# Altium PCB CPU_Board.PcbDoc
Units mil, origin at the board's own origin, x right, y up, seen from the top; angles counter-clockwise.
Board outline 6000 x 4000 mil, 2 copper layers (Top Layer, Bottom Layer); 90 components, 80 nets, 562 pads, 68 vias.
Unrouted connection lines stored in the file: 148.
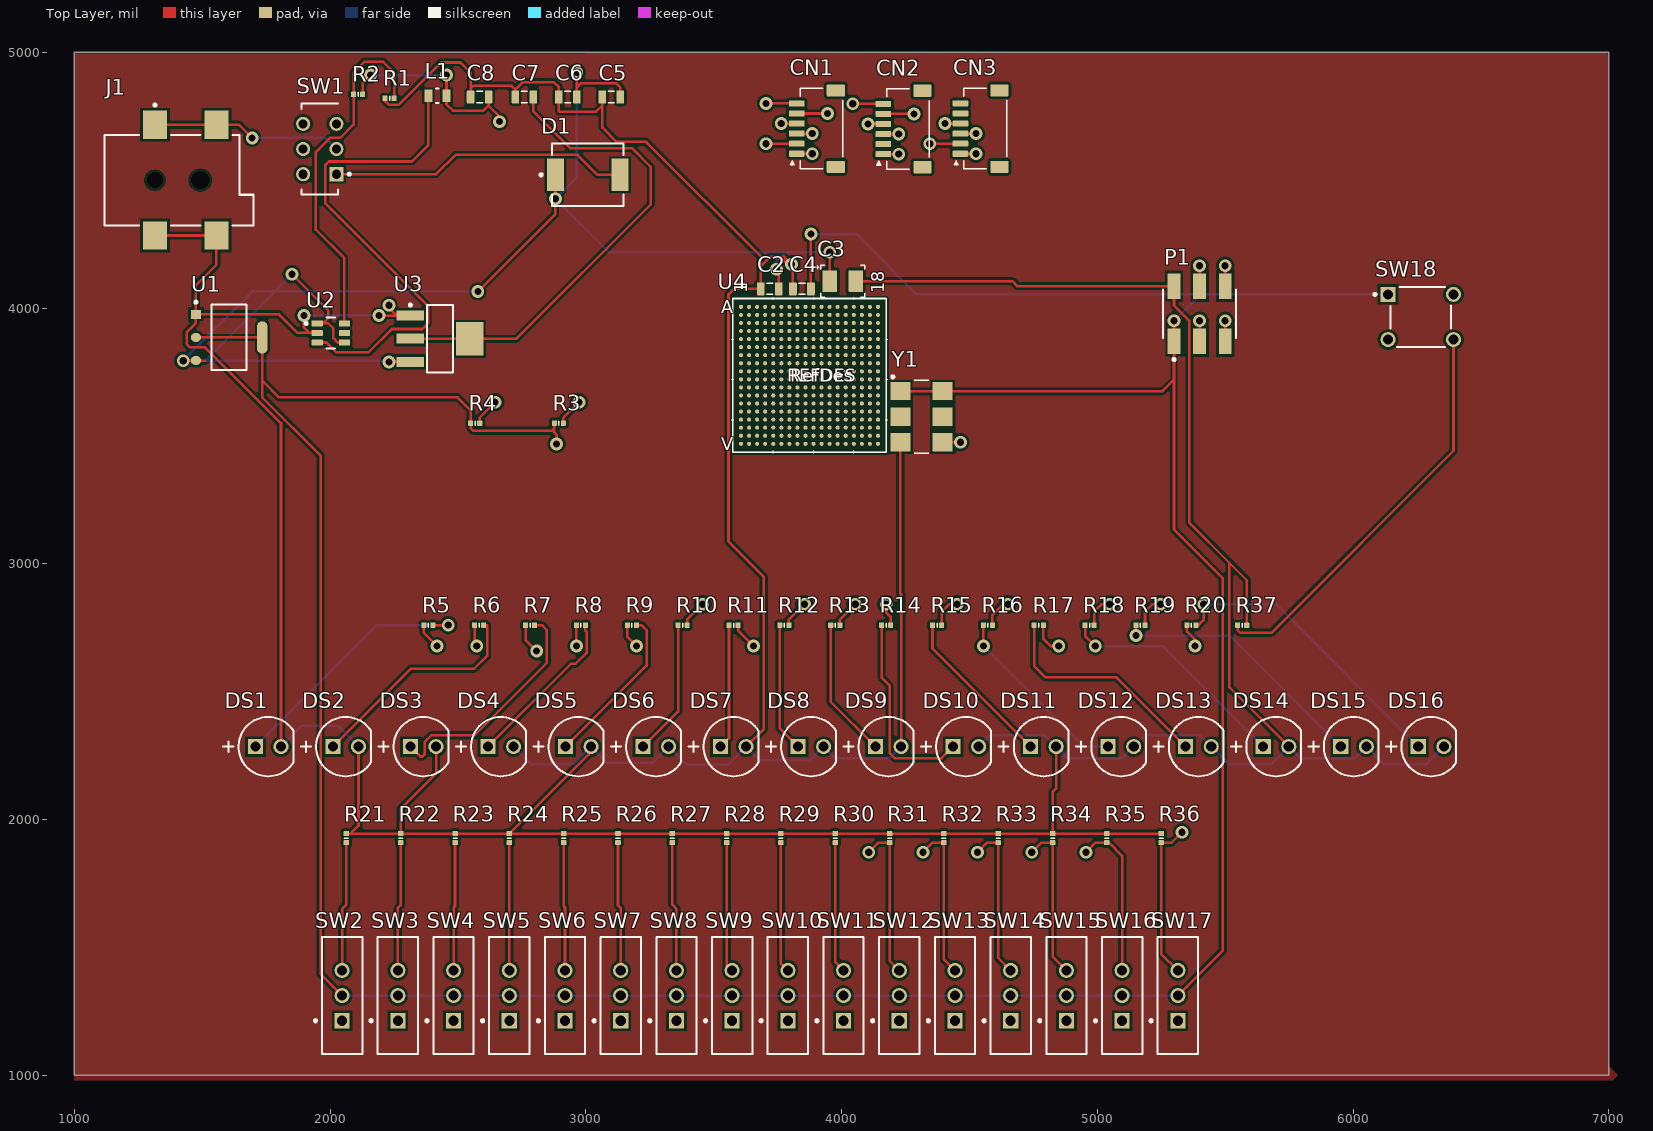
[diagram p0: Top Layer view]
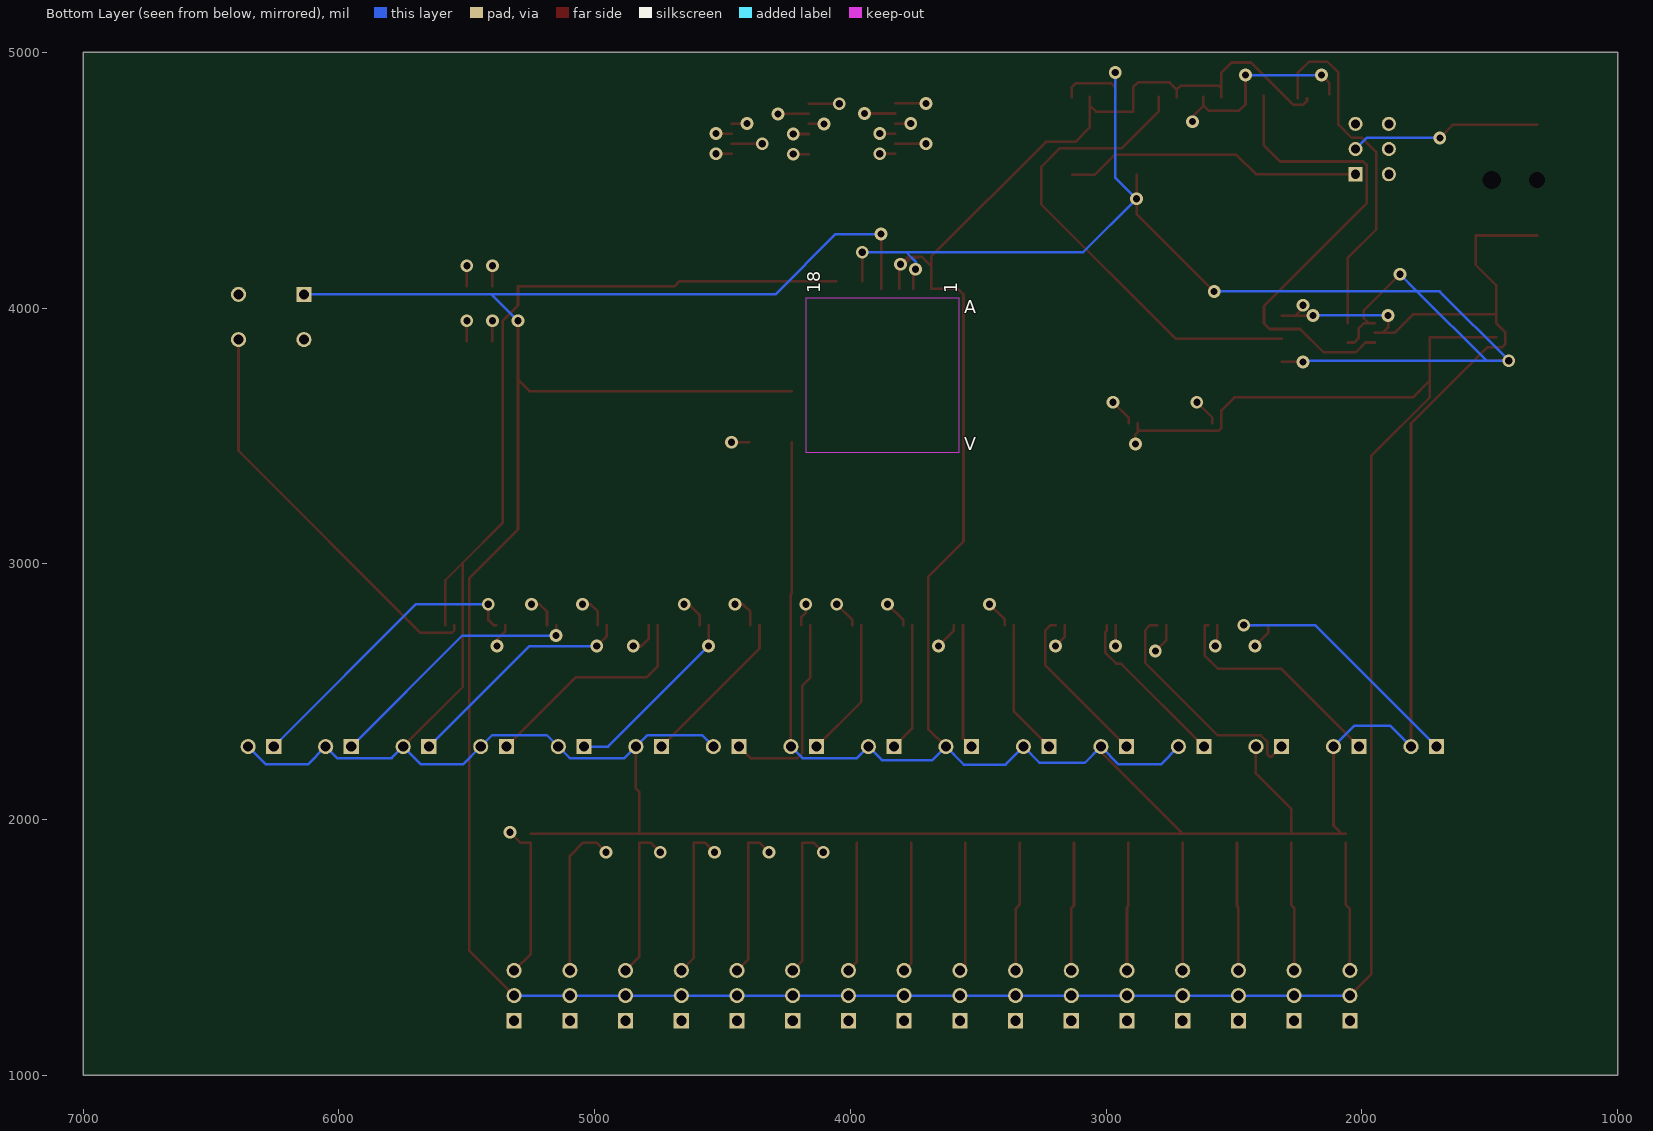
[diagram p1: Bottom Layer view, seen from below]
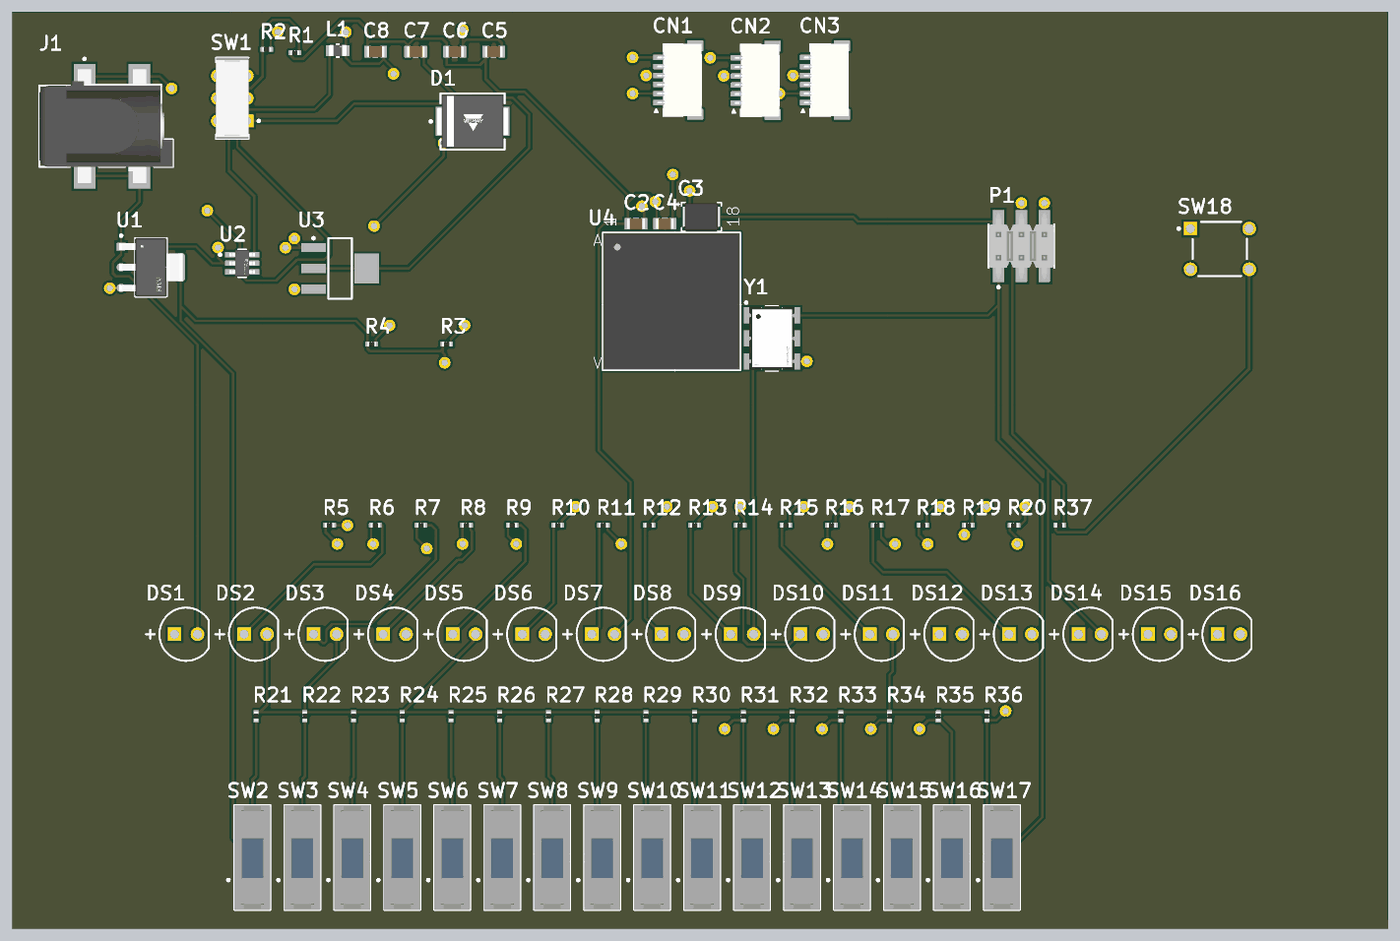
[diagram p2: 3D render of the assembled board from above, using the file's embedded part models]

## Layer stack, top to bottom
Top Solder: solder mask 0.4, Solder Resist, Dk 3.5
Top Layer: signal copper 1.4
Dielectric 1: dielectric 12.6, FR-4, Dk 4.8
Bottom Layer: signal copper 1.4
Bottom Solder: solder mask 0.4, Solder Resist, Dk 3.5

## Board outline
1000,1000 7000,1000 7000,5000 1000,5000

## Design rules (kind name [scope] priority, off if disabled: settings)
Clearance [All] p1: gap=10 ignorepadtopadclearanceinfootprint=FALSE
PolygonConnect [All] p1: connectstyle=Relief reliefconductorwidth=10 reliefentries=4 polygonreliefangle="90 Angle" airgapwidth=10
RoutingVias [All] p1: holewidth=28 width=50 viastyle="Through Hole" minholewidth=28 minwidth=50 maxholewidth=28 maxwidth=50
SolderMaskExpansion [All] p1: expansion=0 istentingtop=FALSE
SupplyNets "Schematic Supply Nets_4" [InNet('+3V3')] p1: voltage=0.000
SupplyNets "Schematic Supply Nets_3" [InNet('+1V8')] p2: voltage=0.000
SupplyNets "Schematic Supply Nets_2" [InNet('GND')] p3: voltage=0.000
SupplyNets "Schematic Supply Nets_1" [InNet('+1V0')] p4: voltage=0.000
SupplyNets "Schematic Supply Nets" [InNet('+5V')] p5: voltage=0.000
Width [All] p1: maxlimit=10 minlimit=10 preferedwidth=10
30 further rules are at their usual default settings.

## Classes and differential pairs
component class Power_Supply: C2 C3 C4 C5 C6 C7 C8 D1 J1 L1 R1 R2 SW1 U1 U2
component class Peripherals: CN1 CN2 CN3 DS1 DS2 DS3 DS4 DS5 DS6 DS7 DS8 DS9 DS10 DS11 DS12 DS13 DS14 DS15 DS16 R5 R6 R7 R8 R9 R10 R11 R12 R13 R14 R15 R16 R17 R18 R19 R20 R21 R22 R23 R24 R25 R26 R27 R28 R29 R30 R31 R32 R33 R34 R35 R36 R37 SW2 SW3 SW4 SW5 SW6 SW7 SW8 SW9 SW10 SW11 SW12 SW13 SW14 SW15 SW16 SW17 SW18
component class FPGA_Core: P1 R3 R4 U4 Y1

## Components (designator, comment, footprint, x,y, rotation, side; value= is the part's Value field where it differs from the comment)
C2 "Capacitor 10µF +/-20% 25V 0805" CAPC0805(2012)145_L 3719.96,4075 r0 top value=10µF
C3 "Capacitor 6.8µF +/-20% 35V B2" PNSC-6TPE150MAZB_L 4005,4105 r0 top value=100µF
C4 "Capacitor 10µF +/-20% 25V 0805" CAPC0805(2012)145_L 3845.43,4075 r0 top value=22µF
C5 "Capacitor 10µF +/-20% 25V 0805" CAPC0805(2012)145_L 3100,4825 r0 top value=10µF
C6 "Capacitor 10µF +/-20% 25V 0805" CAPC0805(2012)145_L 2930,4825 r0 top value=10µF
C7 "Capacitor 10µF +/-20% 25V 0805" CAPC0805(2012)145_L 2760,4825 r0 top value=22µF
C8 "Capacitor 10µF +/-20% 25V 0805" CAPC0805(2012)145_L 2585,4825 r0 top value=10µF
CN1 "SM06B-SRSS-TB" JST-SM06B-SRSS-TB_V 3921.46,4701.57 r90 top
CN2 "SM06B-SRSS-TB" JST-SM06B-SRSS-TB_V 4260,4700 r90 top
CN3 "SM06B-SRSS-TB" JST-SM06B-SRSS-TB_V 4561.46,4701.57 r90 top
D1 "SS34-E3/9AT" FP-SMC-MFG 3007.47,4520.95 r0 top
DS1 "UR502DC" CGX-UR502DC 1758.35,2285 r0 top
DS2 "UR502DC" CGX-UR502DC 2061.46,2285 r0 top
DS3 "UR502DC" CGX-UR502DC 2364.57,2285 r0 top
DS4 "UR502DC" CGX-UR502DC 2667.68,2285 r0 top
DS5 "UR502DC" CGX-UR502DC 2970.79,2285 r0 top
DS6 "UR502DC" CGX-UR502DC 3273.9,2285 r0 top
DS7 "UR502DC" CGX-UR502DC 3577.01,2285 r0 top
DS8 "UR502DC" CGX-UR502DC 3880.12,2285 r0 top
DS9 "UR502DC" CGX-UR502DC 4183.23,2285 r0 top
DS10 "UR502DC" CGX-UR502DC 4486.34,2285 r0 top
DS11 "UR502DC" CGX-UR502DC 4789.45,2285 r0 top
DS12 "UR502DC" CGX-UR502DC 5092.56,2285 r0 top
DS13 "UR502DC" CGX-UR502DC 5395.67,2285 r0 top
DS14 "UR502DC" CGX-UR502DC 5698.78,2285 r0 top
DS15 "UR502DC" CGX-UR502DC 6001.89,2285 r0 top
DS16 "UR502DC" CGX-UR502DC 6305,2285 r0 top
J1 "PJ-002AH-SMT-TR" CUI-PJ-002AH-4_V 1410,4500 r0 top
L1 "MLZ2012A2R2WTD25" FP-MLZ2012-0_85-MFG 2420,4830 r0 top
P1 "95278-101A06LF" AMPM-95278-101A06LF_V 5400,3977.52 r0 top
R1 "Resistor 100K +/-1 % 0402 63 mW" RESC0402(1005)_L 2232.72,4820 r0 top value=150k
R2 "Resistor 100K +/-1 % 0402 63 mW" RESC0402(1005)_L 2110,4835 r0 top value=100k
R3 "10KR2F" RESC0402(1005)_L 2895,3550 r0 top value=10k
R4 "10KR2F" RESC0402(1005)_L 2567.72,3550 r0 top value=10k
R5 "Resistor 330R +/-5 % 0402 63 mW" RESC0402(1005)_L 2384.41,2760 r0 top value=330
R6 "Resistor 330R +/-5 % 0402 63 mW" RESC0402(1005)_L 2583.31,2760 r0 top value=330
R7 "Resistor 330R +/-5 % 0402 63 mW" RESC0402(1005)_L 2782.2,2760 r0 top value=330
R8 "Resistor 330R +/-5 % 0402 63 mW" RESC0402(1005)_L 2981.1,2760 r0 top value=330
R9 "Resistor 330R +/-5 % 0402 63 mW" RESC0402(1005)_L 3180,2760 r0 top value=330
R10 "Resistor 330R +/-5 % 0402 63 mW" RESC0402(1005)_L 3378.9,2760 r180 top value=330
R11 "Resistor 330R +/-5 % 0402 63 mW" RESC0402(1005)_L 3577.8,2760 r180 top value=330
R12 "Resistor 330R +/-5 % 0402 63 mW" RESC0402(1005)_L 3776.69,2760 r180 top value=330
R13 "Resistor 330R +/-5 % 0402 63 mW" RESC0402(1005)_L 3975.59,2760 r180 top value=330
R14 "Resistor 330R +/-5 % 0402 63 mW" RESC0402(1005)_L 4174.49,2760 r180 top value=330
R15 "Resistor 330R +/-5 % 0402 63 mW" RESC0402(1005)_L 4373.39,2760 r180 top value=330
R16 "Resistor 330R +/-5 % 0402 63 mW" RESC0402(1005)_L 4572.28,2760 r180 top value=330
R17 "Resistor 330R +/-5 % 0402 63 mW" RESC0402(1005)_L 4771.18,2760 r180 top value=330
R18 "Resistor 330R +/-5 % 0402 63 mW" RESC0402(1005)_L 4970.08,2760 r180 top value=330
R19 "Resistor 330R +/-5 % 0402 63 mW" RESC0402(1005)_L 5168.98,2760 r180 top value=330
R20 "Resistor 330R +/-5 % 0402 63 mW" RESC0402(1005)_L 5367.87,2760 r0 top value=330
R21 "10KR2F" RESC0402(1005)_L 2063.98,1927.28 r90 top value=10k
R22 "10KR2F" RESC0402(1005)_L 2276.38,1927.28 r90 top value=10k
R23 "10KR2F" RESC0402(1005)_L 2488.78,1927.28 r90 top value=10k
R24 "10KR2F" RESC0402(1005)_L 2701.18,1927.28 r90 top value=10k
R25 "10KR2F" RESC0402(1005)_L 2913.58,1927.28 r90 top value=10k
R26 "10KR2F" RESC0402(1005)_L 3125.99,1927.28 r90 top value=10k
R27 "10KR2F" RESC0402(1005)_L 3338.39,1927.28 r90 top value=10k
R28 "10KR2F" RESC0402(1005)_L 3550.79,1927.28 r90 top value=10k
R29 "10KR2F" RESC0402(1005)_L 3763.19,1927.28 r90 top value=10k
R30 "10KR2F" RESC0402(1005)_L 3975.59,1927.28 r90 top value=10k
R31 "10KR2F" RESC0402(1005)_L 4187.99,1927.28 r90 top value=10k
R32 "10KR2F" RESC0402(1005)_L 4400.39,1927.28 r90 top value=10k
R33 "10KR2F" RESC0402(1005)_L 4612.8,1927.28 r90 top value=10k
R34 "10KR2F" RESC0402(1005)_L 4825.2,1927.28 r90 top value=10k
R35 "10KR2F" RESC0402(1005)_L 5037.6,1927.28 r90 top value=10k
R36 "10KR2F" RESC0402(1005)_L 5250,1927.28 r90 top value=10k
R37 "10KR2F" RESC0402(1005)_L 5566.77,2760 r0 top value=10k
SW1 "JS202011CQN" FP-JS202011CQN-MFG 1960.04,4621.57 r90 top
SW2 "EG1218" ESWI-EG1218_V 2047.48,1311.57 r90 top
SW3 "EG1218" ESWI-EG1218_V 2265.31,1311.57 r90 top
SW4 "EG1218" ESWI-EG1218_V 2483.15,1311.57 r90 top
SW5 "EG1218" ESWI-EG1218_V 2700.98,1311.57 r90 top
SW6 "EG1218" ESWI-EG1218_V 2918.82,1311.57 r90 top
SW7 "EG1218" ESWI-EG1218_V 3136.65,1311.57 r90 top
SW8 "EG1218" ESWI-EG1218_V 3354.49,1311.57 r90 top
SW9 "EG1218" ESWI-EG1218_V 3572.32,1311.57 r90 top
SW10 "EG1218" ESWI-EG1218_V 3790.16,1311.57 r90 top
SW11 "EG1218" ESWI-EG1218_V 4007.99,1311.57 r90 top
SW12 "EG1218" ESWI-EG1218_V 4225.83,1311.57 r90 top
SW13 "EG1218" ESWI-EG1218_V 4443.66,1311.57 r90 top
SW14 "EG1218" ESWI-EG1218_V 4661.5,1311.57 r90 top
SW15 "EG1218" ESWI-EG1218_V 4879.33,1311.57 r90 top
SW16 "EG1218" ESWI-EG1218_V 5097.17,1311.57 r90 top
SW17 "EG1218" ESWI-EG1218_V 5315,1311.57 r90 top
SW18 "B3F-1000" OMRON-B3F-1000-4_V 6265,3965 r0 top
U1 "AMS1117-3.3" FP-AMS1117-IPC_C 1605.28,3885 r0 top
U2 "TLV62568PDDCT" FP-DDC0006A-MFG 2003.15,3902.6 r0 top
U3 "LD1117S18TR" SOT-223_M 2430,3880 r0 top
U4 "XC7A100T-1CSG324C" CSG324_XIL 3874.72,3736.77 r0 top
Y1 "XLH735100.000000X" JU6_MFG 4312.68,3575 r0 top

## Footprints (in the part's own frame and the unit in brackets; to place one, negate y for a bottom-side part, rotate by r counter-clockwise, add the part's x,y. Pads: shape width x height; smd on the part's side, far side on the other; paste and mask are expansions set on the pad)
AMPM-95278-101A06LF_V [mm] "SMD, 6-Leads, Body 7.26x4.83mm, Pitch 2.54mm"
  rect 1.27x2.54 smd: 1(-2.54,-2.73) 2(-2.54,2.73) 3(0,-2.73) 4(0,2.73) 5(2.54,-2.73) 6(2.54,2.73)
  silkscreen extent -3.63,-4.67 3.63,2.42, body extent -3.61,-3.64 3.61,3.64, height 9.71
CAPC0805(2012)145_L [mm] "Chip Capacitor, Body 2.0x1.2mm, Height 1.45mm, IPC High Density"
  rrect25% 0.76x1.3 smd: 1(-0.9,0) 2(0.89,0)
  silkscreen extent -0.3,-0.55 0.3,0.55, body extent -1,-0.6 1,0.6, height 1.45
CGX-UR502DC [mm] "THD, 2-Leads, Dia 5.9mm, Pin Spacing 2.54mm"
  rect 1.5x1.5 hole 1: 1(-1.27,0)
  round 1.5 hole 1: 2(1.27,0)
  silkscreen extent -4.47,-2.95 2.5,2.95, body extent -2.95,-2.95 2.5,2.95, height 9.1
CSG324_XIL [mil]
  round 16 smd paste+0 mask+0: A1(-267.72,267.72) A2(-236.22,267.72) A3(-204.72,267.72) A4(-173.23,267.72) A5(-141.73,267.72) A6(-110.24,267.72) A7(-78.74,267.72) A8(-47.24,267.72) A9(-15.75,267.72) A10(15.75,267.72) A11(47.24,267.72) A12(78.74,267.72) A13(110.24,267.72) A14(141.73,267.72) A15(173.23,267.72) A16(204.72,267.72) A17(236.22,267.72) A18(267.72,267.72) B1(-267.72,236.22) B2(-236.22,236.22) B3(-204.72,236.22) B4(-173.23,236.22) B5(-141.73,236.22) B6(-110.24,236.22) B7(-78.74,236.22) B8(-47.24,236.22) B9(-15.75,236.22) B10(15.75,236.22) B11(47.24,236.22) B12(78.74,236.22) B13(110.24,236.22) B14(141.73,236.22) B15(173.23,236.22) B16(204.72,236.22) B17(236.22,236.22) B18(267.72,236.22) C1(-267.72,204.72) C2(-236.22,204.72) C3(-204.72,204.72) C4(-173.23,204.72) C5(-141.73,204.72) C6(-110.24,204.72) C7(-78.74,204.72) C8(-47.24,204.72) C9(-15.75,204.72) C10(15.75,204.72) C11(47.24,204.72) C12(78.74,204.72) C13(110.24,204.72) C14(141.73,204.72) C15(173.23,204.72) C16(204.72,204.72) C17(236.22,204.72) C18(267.72,204.72) D1(-267.72,173.23) D2(-236.22,173.23) D3(-204.72,173.23) D4(-173.23,173.23) D5(-141.73,173.23) D6(-110.24,173.23) D7(-78.74,173.23) D8(-47.24,173.23) D9(-15.75,173.23) D10(15.75,173.23) D11(47.24,173.23) D12(78.74,173.23) D13(110.24,173.23) D14(141.73,173.23) D15(173.23,173.23) D16(204.72,173.23) D17(236.22,173.23) D18(267.72,173.23) E1(-267.72,141.73) E2(-236.22,141.73) E3(-204.72,141.73) E4(-173.23,141.73) E5(-141.73,141.73) E6(-110.24,141.73) E7(-78.74,141.73) E8(-47.24,141.73) E9(-15.75,141.73) E10(15.75,141.73) E11(47.24,141.73) E12(78.74,141.73) E13(110.24,141.73) E14(141.73,141.73) E15(173.23,141.73) E16(204.72,141.73) E17(236.22,141.73) E18(267.72,141.73) F1(-267.72,110.24) F2(-236.22,110.24) F3(-204.72,110.24) F4(-173.23,110.24) F5(-141.73,110.24) F6(-110.24,110.24) F7(-78.74,110.24) F8(-47.24,110.24) F9(-15.75,110.24) F10(15.75,110.24) F11(47.24,110.24) F12(78.74,110.24) F13(110.24,110.24) F14(141.73,110.24) F15(173.23,110.24) F16(204.72,110.24) F17(236.22,110.24) F18(267.72,110.24) G1(-267.72,78.74) G2(-236.22,78.74) G3(-204.72,78.74) G4(-173.23,78.74) G5(-141.73,78.74) G6(-110.24,78.74) G7(-78.74,78.74) G8(-47.24,78.74) G9(-15.75,78.74) G10(15.75,78.74) G11(47.24,78.74) G12(78.74,78.74) G13(110.24,78.74) G14(141.73,78.74) G15(173.23,78.74) G16(204.72,78.74) G17(236.22,78.74) G18(267.72,78.74) H1(-267.72,47.24) H2(-236.22,47.24) H3(-204.72,47.24) H4(-173.23,47.24) H5(-141.73,47.24) H6(-110.24,47.24) H7(-78.74,47.24) H8(-47.24,47.24) H9(-15.75,47.24) H10(15.75,47.24) H11(47.24,47.24) H12(78.74,47.24) H13(110.24,47.24) H14(141.73,47.24) H15(173.23,47.24) H16(204.72,47.24) H17(236.22,47.24) H18(267.72,47.24) J1(-267.72,15.75) J2(-236.22,15.75) J3(-204.72,15.75) J4(-173.23,15.75) J5(-141.73,15.75) J6(-110.24,15.75) J7(-78.74,15.75) J8(-47.24,15.75) J9(-15.75,15.75) J10(15.75,15.75) J11(47.24,15.75) J12(78.74,15.75) J13(110.24,15.75) J14(141.73,15.75) J15(173.23,15.75) J16(204.72,15.75) J17(236.22,15.75) J18(267.72,15.75) K1(-267.72,-15.75) K2(-236.22,-15.75) K3(-204.72,-15.75) K4(-173.23,-15.75) K5(-141.73,-15.75) K6(-110.24,-15.75) K7(-78.74,-15.75) K8(-47.24,-15.75) K9(-15.75,-15.75) K10(15.75,-15.75) K11(47.24,-15.75) K12(78.74,-15.75) K13(110.24,-15.75) K14(141.73,-15.75) K15(173.23,-15.75) K16(204.72,-15.75) K17(236.22,-15.75) K18(267.72,-15.75) L1(-267.72,-47.24) L2(-236.22,-47.24) L3(-204.72,-47.24) L4(-173.23,-47.24) L5(-141.73,-47.24) L6(-110.24,-47.24) L7(-78.74,-47.24) L8(-47.24,-47.24) L9(-15.75,-47.24) L10(15.75,-47.24) L11(47.24,-47.24) L12(78.74,-47.24) L13(110.24,-47.24) L14(141.73,-47.24) L15(173.23,-47.24) L16(204.72,-47.24) L17(236.22,-47.24) L18(267.72,-47.24) M1(-267.72,-78.74) M2(-236.22,-78.74) M3(-204.72,-78.74) M4(-173.23,-78.74) M5(-141.73,-78.74) M6(-110.24,-78.74) M7(-78.74,-78.74) M8(-47.24,-78.74) M9(-15.75,-78.74) M10(15.75,-78.74) M11(47.24,-78.74) M12(78.74,-78.74) M13(110.24,-78.74) M14(141.73,-78.74) M15(173.23,-78.74) M16(204.72,-78.74) M17(236.22,-78.74) M18(267.72,-78.74) N1(-267.72,-110.24) N2(-236.22,-110.24) N3(-204.72,-110.24) N4(-173.23,-110.24) N5(-141.73,-110.24) N6(-110.24,-110.24) N7(-78.74,-110.24) N8(-47.24,-110.24) N9(-15.75,-110.24) N10(15.75,-110.24) N11(47.24,-110.24) N12(78.74,-110.24) N13(110.24,-110.24) N14(141.73,-110.24) N15(173.23,-110.24) N16(204.72,-110.24) N17(236.22,-110.24) N18(267.72,-110.24) P1(-267.72,-141.73) P2(-236.22,-141.73) P3(-204.72,-141.73) P4(-173.23,-141.73) P5(-141.73,-141.73) P6(-110.24,-141.73) P7(-78.74,-141.73) P8(-47.24,-141.73) P9(-15.75,-141.73) P10(15.75,-141.73) P11(47.24,-141.73) P12(78.74,-141.73) P13(110.24,-141.73) P14(141.73,-141.73) P15(173.23,-141.73) P16(204.72,-141.73) P17(236.22,-141.73) P18(267.72,-141.73) R1(-267.72,-173.23) R2(-236.22,-173.23) R3(-204.72,-173.23) R4(-173.23,-173.23) R5(-141.73,-173.23) R6(-110.24,-173.23) R7(-78.74,-173.23) R8(-47.24,-173.23) R9(-15.75,-173.23) R10(15.75,-173.23) R11(47.24,-173.23) R12(78.74,-173.23) R13(110.24,-173.23) R14(141.73,-173.23) R15(173.23,-173.23) R16(204.72,-173.23) R17(236.22,-173.23) R18(267.72,-173.23) T1(-267.72,-204.72) T2(-236.22,-204.72) T3(-204.72,-204.72) T4(-173.23,-204.72) T5(-141.73,-204.72) T6(-110.24,-204.72) T7(-78.74,-204.72) T8(-47.24,-204.72) T9(-15.75,-204.72) T10(15.75,-204.72) T11(47.24,-204.72) T12(78.74,-204.72) T13(110.24,-204.72) T14(141.73,-204.72) T15(173.23,-204.72) T16(204.72,-204.72) T17(236.22,-204.72) T18(267.72,-204.72) U1(-267.72,-236.22) U2(-236.22,-236.22) U3(-204.72,-236.22) U4(-173.23,-236.22) U5(-141.73,-236.22) U6(-110.24,-236.22) U7(-78.74,-236.22) U8(-47.24,-236.22) U9(-15.75,-236.22) U10(15.75,-236.22) U11(47.24,-236.22) U12(78.74,-236.22) U13(110.24,-236.22) U14(141.73,-236.22) U15(173.23,-236.22) U16(204.72,-236.22) U17(236.22,-236.22) U18(267.72,-236.22) V1(-267.72,-267.72) V2(-236.22,-267.72) V3(-204.72,-267.72) V4(-173.23,-267.72) V5(-141.73,-267.72) V6(-110.24,-267.72) V7(-78.74,-267.72) V8(-47.24,-267.72) V9(-15.75,-267.72) V10(15.75,-267.72) V11(47.24,-267.72) V12(78.74,-267.72) V13(110.24,-267.72) V14(141.73,-267.72) V15(173.23,-267.72) V16(204.72,-267.72) V17(236.22,-267.72) V18(267.72,-267.72)
  Keep-Out Layer region: -300.96,-300.96 -300.96,300.96 300.96,300.96 300.96,-300.96
  silkscreen extent -306,-305 305,306, body extent -296,-296 296,296, height 59
CUI-PJ-002AH-4_V [mm] "SMD, 4-Leads, Body 14.8x9 mm, Pitch 6.1mm"
  rect 2.4x2.8 smd: 1(-2.4,5.5) 1(3.7,5.5) 2(-2.4,-5.5) 3(3.7,-5.5)
  round 0 hole 1.6: MH1(-2.4,0)
  round 0 hole 1.8: MH2(2.1,0)
  silkscreen extent -7.4,-4.5 7.4,7.57, body extent -7.4,-6.3 7.4,6.3, height 11.2
ESWI-EG1218_V [mm] "THD, 3-Leads, Body 11.6x4mm, Pitch 2.5mm"
  rect 1.5x1.5 hole 1: 1(-2.5,0)
  round 1.5 hole 1: 2(0,0) 3(2.5,0)
  silkscreen extent -5.8,-2 5.8,2.77, body extent -5.8,-2 5.8,2, height 7.4
FP-AMS1117-IPC_C [mm]
  rect 1.004x0.872 smd paste+0 mask+0: 1(-3.295,2.29)
  rrect100% 1.004x0.872 smd paste+0 mask+0: 2(-3.295,0) 3(-3.295,-2.29)
  rrect87% 1.004x3.182 smd paste+0 mask+0: 4(3.295,0)
  silkscreen extent -3.42,-3.25 1.75,3.62, body extent -3.9,-3.35 3.9,3.35, height 0.25
FP-DDC0006A-MFG [mm]
  rrect17% 1.1x0.6 smd paste+0 mask+0: 1(-1.35,0.95) 2(-1.35,0) 3(-1.35,-0.95) 4(1.35,-0.95) 5(1.35,0) 6(1.35,0.95)
  silkscreen extent -2.57,-1.53 0.42,1.53, body extent -2,-1.63 2,1.63, height 0.25
FP-JS202011CQN-MFG [mm]
  rect 1.4x1.4 hole 0.9 paste-2539.97 mask+0: 1(-2.5,-1.65)
  round 1.4 hole 0.9 paste-2539.97 mask+0: 2(0,-1.65) 3(2.5,-1.65) 4(2.5,1.65) 5(0,1.65) 6(-2.5,1.65)
  silkscreen extent -4.5,-3.05 4.5,1.8, body extent -4.6,-2.45 4.6,2.45, height 0.25
FP-MLZ2012-0_85-MFG [mm]
  rect 0.8x1.2 smd paste+0 mask+0: 1(-0.9,0) 2(0.9,0)
  silkscreen extent -0.13,-0.73 0.13,0.73, body extent -1.4,-0.82 1.4,0.82, height 0.25
FP-SMC-MFG [mm]
  rect 1.72x3.2 smd paste+0 mask+0: 1(-3.205,0) 2(3.205,0)
  silkscreen extent -4.75,-3.11 3.56,3.11, body extent -4.17,-3.21 4.17,3.21, height 0.25
JST-SM06B-SRSS-TB_V [mm] "SMD, 6-Leads, Body 8x4.25mm, Pitch 1mm"
  rrect25% 0.6x1.55 smd: 1(-2.5,2.45) 2(-1.5,2.45) 3(-0.5,2.45) 4(0.5,2.45) 5(1.5,2.45) 6(2.5,2.45)
  rrect15% 1.2x1.8 smd: MP1(-3.8,-1.425) MP2(3.8,-1.425)
  silkscreen extent -4,-2.12 4,3.09, body extent -4,-2.15 4,2.8, height 2.9
JU6_MFG [mm] "Recommended Land Pattern"
  rect 2x1.8 smd paste+0 mask+0: 1(-2.1,2.54) 2(-2.1,0) 3(-2.1,-2.54) 4(2.1,-2.54) 5(2.1,0) 6(2.1,2.54)
  silkscreen extent -2.97,-3.64 0.72,4.09, body extent -2.5,-3.5 2.5,3.5, height 1.45
OMRON-B3F-1000-4_V [mm] "TH, 4-Leads, Body 6x6mm"
  rect 1.5x1.5 hole 1 paste-2539.97: 1(-3.25,2.25)
  round 1.5 hole 1 paste-2539.97: 2(3.25,2.25) 4(3.25,-2.25)
  round 1.5 hole 1 paste-2539.97 mask+0.102: 3(-3.25,-2.25)
  silkscreen extent -4.67,-3 3,3, body extent -3,-3 3,3, height 4.5
PNSC-6TPE150MAZB_L [mm] "Molded Capacitor, 2-Leads, Body 3.70x3mm, IPC High Density"
  rrect10% 1.45x2.15 smd: 1(-1.3,0) 2(1.3,0)
  silkscreen extent -2.7,-1.6 2.2,1.6, body extent -2.07,-1.5 2.07,1.5, height 2
RESC0402(1005)_L [mm] "Chip Resistor, Body 1.0x0.5mm, IPC High Density"
  rrect25% 0.5x0.55 smd: 1(-0.45,0) 2(0.45,0)
  silkscreen extent 0,-0.2 0,0.2, body extent -0.5,-0.25 0.5,0.25, height 0.3
SOT-223_M [mm] "SOT223, 4-Leads, Body 6.5x3.5mm, Pitch 2.3mm, Lead Span 7mm, IPC Low Density"
  rect 2.7x1 smd: 1(-2.95,2.3) 2(-2.95,0) 3(-2.95,-2.3)
  rect 2.7x3.3 smd: 4(2.95,0)
  silkscreen extent -3.07,-3.35 1.3,3.47, body extent -1.85,-3.35 1.85,3.35, height 1.8

## Part data
C2 C4 C5 C6 C7 C8: library part CMP-001-00079-4, "Chip Capacitor, 10µF +/-20%, 25V, 0805, Thickness 1.45 mm", Case/Package=0805, Max Operating Temperature=85°C, Min Operating Temperature=-55°C, Tolerance=10%, Voltage Rating=25V, Mounting Technology=SMT, Pins=2
C3: library part CMP-001-00059-3, "Molded Tantalum Polymer Capacitor, 6.8 uF, +/- 20%, 35 V, -55 to 105 degC, 2-Pin SMD, RoHS, Tape and Reel", Case/Package=1210, Max Operating Temperature=105°C, Min Operating Temperature=-55°C, Tolerance=20%, Voltage Rating=35V, Mounting Technology=SMT, Pins=2
CN1 CN2 CN3: library part CMP-002-00060-3, "Male Header, Pitch 1 mm, 1 x 6 Position, Height 2.95 mm, -25 to 85 degC, RoHS, Tape and Reel", Case/Package="Male Header, Pitch 1 mm, 1 X 6 Position, Height 2.9 mm", Mounting Technology=SurfaceMount, Pins=8
D1: library part CMP-02539-000066-1, "DIODE SCHOTTKY 40V 3A DO214AB", Average Rectified Current=3A, Case/Package=SMC, Forward Voltage=500mV, Max Operating Temperature=125°C, Max Repetitive Reverse Voltage (Vrrm)=40V, Max Reverse Current=500uA, Max Surge Current=100A, Min Operating Temperature=-55°C, Package Quantity=3500, Element Configuration=Single, Forward Current=3A, Max Reverse Leakage Current=500uA, Max Reverse Voltage (DC)=40V, Mount="Surface Mount", Number of Pins=2, Packaging="Tape and Reel", Peak Non-Repetitive Surge Current=100A, Radiation Hardening=No, RoHS Compliant=Yes, Series=-
DS1 DS2 DS3 DS4 DS5 DS6 DS7 DS8 DS9 DS10 DS11 DS12 DS13 DS14 DS15 DS16: library part CMP-007-00009-2, "Red LED, 80 mW, 30 mA, -25 to 85 degC, 2-Pin THD", Manufacturer="Shenzhen CGX", Package Description="2-Pin Through Hole Device, Dia 5.9 mm, Height 9.1 mm", Power=80mW, Case/Package=UR502DC, Datasheet URL=http://datasheet.octopart.com/UR502DC-Chengguangxing-datasheet-62330342.pdf, Datasheet Version=Sep-14, Manufacturer URL=http://szcgx.com/, Mounting Technology=TH, Package Reference=UR502DC, RoHS Compliant=Unknown
J1: library part CMP-2000-06896-2, "DC Power Jack, Right Angle, -25 to 85 degC, 4-Pin 14.8 x 9 x 11 mm SMD, RoHS, Tape and Reel", Current Rating=5A, Flammability Rating=UL94V-0, Insulation Resistance=100MOhms, Manufacturer=CUIInc., Operating Temperature Range=-25Cto+85C, Package Description="4-Pin Surface Mount Device, Body 14.8 x 9 mm, Pitch 6.1 mm", Package Reference=PJ-002AH, Voltage Rating=24V, Brand=CUI, Connector Type=DCPowerJack, Contact Gender=Male, Contact Material=Brass, Contact Plating=Nickel, Datasheet URL=http://www.cui.com/product/resource/pj-002ah-smt.pdf, Datasheet Version="Rev. 1.03, 11/2012", Factory Pack Quantity=350, Housing Material=Polyamide(PA), Inside Contact Diameter=2mm, Manufacturer URL=http://www.cui.com/, Mounting Angle=Right, Mounting Style=SMD/SMT, Mounting Technology=SurfaceMount, Outside Contact Diameter=6.5mm, Packaging=Reel, PartNumber=PJ-002AH, Product=Jacks, Product Category=DCPowerConnectors, RoHS=True, Termination Style=SMD/SMT
L1: library part CMP-08253-000205-1, "Shielded Multilayer Inductor 2.2uH ±20% 650mA 195mΩ AEC-Q200 SMD 0805", Case Code (Imperial)=0805, Case Code (Metric)=2012, Current Rating=650mA, DC Resistance (DCR)=195mR, Inductance=2.2uH, Max Operating Temperature=125°C, Min Operating Temperature=-55°C, Package Quantity=4000, Ratings=AEC-Q200, Resistance=0.26R, Saturation Current=210mA, Test Frequency=10MHz, Tolerance=20%, Case/Package=0805, Core Material=Ferrite, Height=0.85mm, Height - Seated (Max)=0.041inch, Length=0.079inch, Max DC Current=650mA, Mount="Surface Mount", Packaging="Tape and Reel", RoHS Compliant=Yes, Shielding=Shielded, Termination=SMD/SMT, Weight=0.000194oz, Width=1.25mm
P1: library part CMP-002-00024-2, "Male Header, Pitch 2.54 mm, 2 x 3 Position, Height 14.4 mm, RoHS, Tape and Reel", Manufacturer=Amphenol, Package Description="Male Header, Pitch 2.54 mm, 2 x 3 Position, Height 14.4 mm", Case/Package=95278-101A06LF, Connector Type=Header, Datasheet URL=http://portal.fciconnect.com/Comergent//fci/drawing/95278.pdf, Datasheet Version="Rev. AC, 03/2016", Gender=Male, Mounting Technology=SM, Package Reference=95278-101A06LF, RoHS Compliant=Unknown
R1 R2: library part CMP-009-00168-3, "Chip Resistor, 100 kOhms, +/-1 %, 63 mW, -55 to 155 degC, 0402", Case/Package=0402, Max Operating Temperature=155°C, Min Operating Temperature=-55°C, Power=63mW, Tolerance=1%, Pins=2
R3 R4 R21 R22 R23 R24 R25 R26 R27 R28 R29 R30 R31 R32 R33 R34 R35 R36 R37: library part CMP-009-00066-2, "10K 0.063W 1% 0402 (1005 Metric)  SMD", Case/Package=0402, Power=63mW, Tolerance=1%, Mounting Technology=SMT, Pins=2
R5 R6 R7 R8 R9 R10 R11 R12 R13 R14 R15 R16 R17 R18 R19 R20: library part CMP-009-00132-3, "Chip Resistor, 330 Ohms, +/-5 %, 63 mW, -55 to 155 degC, 0402", Case/Package=0402, Max Operating Temperature=155°C, Min Operating Temperature=-55°C, Power=63mW, Tolerance=5%, Pins=2
SW1: library part CMP-10038-000022-1, "SWITCH SLIDE DPDT 300MA 6V", Actuator Color=Black, Contact Current Rating=100mA, Contact Resistance=70mR, Current Rating=300mA, Flammability Rating="UL94 V-0", Max Operating Temperature=85°C, Max Voltage Rating (DC)=6V, Min Operating Temperature=-40°C, Package Quantity=1, Actuator Length=2mm, Actuator Material=Nylon, Actuator Type=Standard, Contact Material="Copper Alloy", Contact Plating=Silver, Depth=3.6mm, Electrical Life=5000Cycles, Housing Material=Nylon, Illumination Type=Non-Illuminated, Lead Free="Lead Free", Length=9mm, Max Current Rating=300mA, Mount="Through Hole", Orientation=Vertical, Packaging=Bulk, Radiation Hardening=No, REACH SVHC="No SVHC", RoHS Compliant=Yes, Series=JS, Switch Function=On-On, Switch Travel=2mm, Termination="PC Pins", Throw Configuration=DPDT, Voltage Rating (DC)=6V
SW2 SW3 SW4 SW5 SW6 SW7 SW8 SW9 SW10 SW11 SW12 SW13 SW14 SW15 SW16 SW17: library part CMP-011-00006-2, "Slide Switch, SPDT, 500 V, -20 to 70 degC, 3-Pin THD, RoHS, Bulk", Contact Current Rating=200mA, Manufacturer=E-Switch, Max Operating Temperature=70°C, Min Operating Temperature=-20°C, Operating Force=250gf, Package Description="3-Pin Through Hole Device, Body 11.6 x 4 mm, Pitch 2.5 mm", Package Quantity=1000, Voltage Rating (AC)=30V, Case/Package=EG1218, Contact Finish=Silver, Contact Material=Copper, Contact Plating=Silver, Current Rating=200mA, Datasheet URL=https://www.e-switch.com/system/asset/product_line/data_sheet/119/EG.pdf, Datasheet Version=Oct-15, Manufacturer URL=http://www.e-switch.ch/en/, Mounting Technology=TH, Package Reference=EG1218, Packaging=Bulk, Pins=3, RoHS Compliant=True, Throw Configuration=SPDT, Voltage Rating (DC)=30V
SW18: library part CMP-1677-00002-1, "Tactile Switch, SPST-NO, 0.05 A, 5 to 24 V, -25 to 70 degC, 4-Pin THD, RoHS, Bulk", Capacitance="-45 f", Current Rating="1.5 A", Max Operating Temperature="70 degC", Min Operating Temperature="-40 degC", Package Quantity=1080, Voltage Rating="150 V", ComponentLink1Description="Manufacturer URL", ComponentLink1URL=http://www.omron.com/, ComponentLink2Description=Datasheet, ComponentLink2URL=http://www.omron.com/ecb/products/pdf/en-b3f.pdf, Contact Material=Brass, Contact Plating=Gold, DatasheetVersion=Jan-15, Gender=Female, Height="14.99 mm", Lead Pitch="1.27 mm", Length="18.34 mm", Mount="Through Hole", PackageDescription="4-Pin Through Hole Device, Body 6 x 6 mm", PackageReference=B3F-1000, Packaging=Tray, Pins=8, Radiation Hardening=No, RoHSCompliant=true, Shielding=Shielded, Width="25.4 mm"
U1: library part CMP-209535-000001-1, "LDO Voltage Regulators 1A, 3.3V", Dropout Voltage=1.1V, Manufacturer="Advanced Monolithic Systems", Max Junction Temp=+125°C, Max Power Dissipation=1.2W, Max Supply Voltage=15V, Nominal Supply Current=5mA, Output Current=1A, Output Voltage=3.3V, Package=AMS1117, Temperature="-40°C to +125°C", Temperature Range Low=-40°C, Automotive=No, Category=IC, ComponentLink2Description=Datasheet, ComponentLink2URL=http://www.advanced-monolithic.com/pdf/ds1117.pdf, Device Class L1="Integrated Circuits (ICs)", Device Class L2="Power Management ICs", Device Class L3="Voltage Regulators - Linear", Height=1.8mm, Ipc Land Pattern Name=SOT229P700X180-4, Lead Free=Yes, Manufacturer Part Number=AMS1117-3.3, Number Of Outputs=1, Octopart=https://octopart.com/ams1117-3.3-advanced+monolithic+systems-25899300, Output Type=Fixed, RoHS=TRUE, Standoff Height=0.64mm, Temperature Range High=+125°C
U2: library part CMP-04918-000671-1, "IC REG BUCK ADJ 1A TSOT23-6", Case/Package=SOT-23-6, Max Input Voltage=5.5V, Max Operating Temperature=125°C, Min Input Voltage=2.5V, Min Operating Temperature=-40°C, Min Output Voltage=600mV, Output Current=1A, Switching Frequency=1.5MHz, Max Output Voltage=5.5V, Mount="Surface Mount", Number Of Outputs=1, Output Configuration=Positive, Output Type=Adjustable, Packaging="Cut Tape", RoHS Compliant=Yes, Synchronous Rectifier=Yes
U3: library part CMP-0244-00308-1, "Fixed Low Drop Positive Voltage Regulator, 1.8V, 4-Pin SOT-223, Tape and Reel", ComponentLink1Description="Manufacturer URL", ComponentLink1URL=http://www.st.com, ComponentLink2Description=Datasheet, ComponentLink2URL=http://www.st.com/internet/com/TECHNICAL_RESOURCES/TECHNICAL_LITERATURE/DATASHEET/CD00000544.pdf, DatasheetVersion=1/11/2011, PackageDescription="4-Pin SOT-223 Package, 6.5 x 3.5 mm Body, 2.3 mm Pitch, 7 mm Lead Span", PackageReference=SOT-223, PackageVersion=2010
U4: "Description", Manufacturer_Name="Xilinx Inc", Copyright="Copyright (C) 2025 Ultra Librarian. All rights reserved.", Manufacturer_Part_Number=XC7A100T-1CSG324C, RefDes=RefDes, Type=Type
Y1: library part CMP-00572-106941302-3, "Crystal ROHS3Compliant Enable/Disable Active Oscillator -20C~70C 47mA 0.055 1.40mm 100MHz", Case/Package=CLCC, Max Input Voltage=3.465V, Max Operating Temperature=70°C, Max Output Frequency=999.9MHz, Min Input Voltage=3.135V, Min Operating Temperature=-20°C, ComponentLink1Description="Manufacturer's Website", ComponentLink1URL=http://www.renesas.com, ComponentLink2Description="Datasheet URL", ComponentLink2URL=https://octopart.com/cad-content/api/get-model-datasheet/15189/106941302, ComponentLink3Description="Manufacturer's Package Drawing", ComponentLink3URL=https://www.renesas.com/en/document/psc/ju6-package-outline-70-x-50-mm-body-13-mm-thick, Height=1.45mm, HelpURL=https://octopart.com/cad-content/api/get-model-datasheet/15189/106941302, Mount="Surface Mount", Number of Pins=6, Output Type=LVCMOS, RoHS=Compliant

## Via types
v1: diameter 50, hole 28, Top Layer to Bottom Layer, 68 vias

## Nets (pads, with @x,y where several pads share a name; then routed paths per layer and width w, separated by ;. In a path a pad name is that pad's centre, name@x,y a point inside that pad or via, vN(x,y) a via of type N, cw(c..) or ccw(c..) an arc to the next point about the centre after c; other vN are vias at no path point)
"  SW_0": R21.1 SW2.3 U4.J15 | length 506.4
  Top Layer w10: SW2.3 2047.48,1651 2063.98,1667.5 R21.1
"  SW_2": R23.1 SW4.3 U4.M13 | length 501.9
  Top Layer w10: SW4.3 2483.15,1656 2488.78,1661.63 R23.1
"  SW_4": R25.1 SW6.3 U4.R17 | length 501.7
  Top Layer w10: R25.1 2913.58,1662.23 2918.82,1657 SW6.3
"  SW_6": R27.1 SW8.3 U4.U18 | length 506.2
  Top Layer w10: R27.1 3338.39,1667.1 3354.49,1651 SW8.3
"  SW_8": R29.1 SW10.3 U4.T8 | length 510.7
  Top Layer w10: R29.1 3763.19,1436.97 SW10.3
"  SW_10": R31.1 SW12.3 U4.R16 | length 612.3
  Top Layer w10: v1(4106.45,1872) 4144.02,1909.57 R31.1 4187.99,1447.83 SW12.3
"  SW_12": R33.1 SW14.3 U4.H6 | length 616.8
  Top Layer w10: v1(4531.26,1872) 4568.82,1909.57 R33.1 4612.8,1458.7 SW14.3
"  SW_14": R35.1 SW16.3 U4.U11 | length 625.7
  Top Layer w10: v1(4956.06,1872) 4993.63,1909.57 R35.1 5045,1909.57 5097.17,1857.4 SW16.3
+1V0: C8.2 L1.2 R2.2 U4.F8 U4.F10 U4.G7 U4.G9 U4.G11 U4.H8 U4.J7 U4.J11 U4.K8 U4.L7 U4.L11 U4.M8 U4.M10 U4.N7 U4.N9 U4.N11 | length 797.6
  Top Layer w10: R2.2 2127.72,4880.72 v1(2158,4911) ; v1(2455.43,4911) L1.2 2455.43,4796.53 2480,4771.96 2600,4771.96 2620.04,4792 ; C8.2 2620.04,4792 ; v1(2662.8,4728.7) 2662.8,4748.1 2620.04,4790.86 2620.04,4792
  Bottom Layer w10: v1(2158,4911) v1(2455.43,4911)
+1V8: C7.2 U3.2 U3.4 U4.F12 U4.H10 U4.H12 U4.K12 U4.M12 | length 1909.4
  Top Layer w10: U3.2 U3.4 2729,3880 3254,4405 3254,4552 3181,4625 2939.04,4625 2795.04,4769 C7.2
+3V3: C4.2 P1.1 R3.1 R4.1 SW2.2 SW3.2 SW4.2 SW5.2 SW6.2 SW7.2 SW8.2 SW9.2 SW10.2 SW11.2 SW12.2 SW13.2 SW14.2 SW15.2 SW16.2 SW17.2 SW18.1 U1.2 U1.4 U4.A7 U4.A17 U4.C3 U4.C13 U4.D6 U4.D16 U4.F2 U4.G5 U4.G15 U4.H18 U4.J1 U4.K4 U4.K14 U4.L17 U4.N3 U4.N13 U4.P6 U4.P8 U4.P16 U4.T2 U4.T12 U4.U5 U4.U15 U4.V8 U4.V18 Y1.1 Y1.6 | length 14177.3
  Top Layer w10: U1.2 U1.4 1735,3716 ; SW2.2 1963,1396.05 1963,3423 1735,3651 1735,3716 ; R3.1 2877.28,3530 ; v1(2886,3468.46) 2886,3504.89 2877.28,3513.6 2877.28,3530 ; C4.2 v1(3880.47,4289) ; Y1.1 Y1.6 5255,3675 5300,3720 ; v1(5300,3950) P1.1 5300,3720 ; SW17.2 5491,1487.57 5491,2943 5300,3134 5300,3720 ; 1735,3716 1800,3651 2499,3651 2550,3600 R4.1 2550,3530 2560,3520 2867.28,3520 2877.28,3530
  Bottom Layer w10: SW2.2 SW3.2 SW4.2 SW5.2 SW6.2 SW7.2 SW8.2 SW9.2 SW10.2 SW11.2 SW12.2 SW13.2 SW14.2 SW15.2 SW16.2 SW17.2 ; v1(3880.47,4289) 4058,4289 4293.42,4053.58 5403.58,4053.58 ; v1(5300,3950) 5403.58,4053.58 ; SW18.1 5403.58,4053.58
+5V: C2.2 C3.1 C5.2 C6.2 D1.1 U1.3 U2.1 U2.4 U3.3 | length 6000.1
  Top Layer w10: v1(1426,3794) 1426.84,3794.84 U1.3 1475.55,3794 1513,3794 ; v1(1851,4132) 1993,3990 1993,3960 1973,3940 ; U2.1 1973,3940 ; U2.4 2029.8,3865.2 2013,3882 2013,3920 1993,3940 1973,3940 ; v1(2231,3789) 2231.45,3789.45 U3.3 ; v1(2578,4065) 2881.29,4368.29 v1(2881.29,4427) D1.1 ; v1(2965,4921) v1(2965,4921) 2965.04,4863.08 ; C6.2 2965.04,4863.08 ; C5.2 3135.04,4863 3120,4878.04 2980,4878.04 2965.04,4863.08 ; v1(3745.5,4151.5) 3755,4142 C2.2 ; C3.1 v1(3953.82,4218)
  Bottom Layer w10: v1(1851,4132) 1784,4065 ; v1(2231,3789) 2226,3794 1513,3794 ; v1(2578,4065) 1784,4065 ; v1(2965,4921) 2965,4510.71 v1(2881.29,4427) 3090.29,4218 3782,4218 ; v1(3745.5,4151.5) 3745.5,4181.5 3782,4218 ; v1(3953.82,4218) 3782,4218 ; 1513,3794 1784,4065 ; 1513,3794 v1(1426,3794) 1697,4065 1784,4065
AN_0: CN2.3 U4.J17 | length 60.5
  Top Layer w10: CN2.3 v1(4224.06,4680.32)
AN_1: CN2.4 U4.J18 | length 60.5
  Top Layer w10: v1(4103.03,4719.69) CN2.4
AN_2: CN2.5 U4.T9 | length 119.9
  Top Layer w10: CN2.5 v1(4283.45,4759.06)
AN_3: CN2.6 U4.J14 | length 119.9
  Top Layer w10: v1(4043.63,4798.43) CN2.6
AN_4: CN3.1 U4.P14 | length 60.5
  Top Layer w10: CN3.1 v1(4525.51,4603.15)
AN_5: CN3.2 U4.T14 | length 119.9
  Top Layer w10: v1(4345.09,4642.52) CN3.2
AN_6: CN3.3 U4.K2 | length 60.5
  Top Layer w10: CN3.3 v1(4525.51,4681.89)
AN_7: CN3.4 U4.U13 | length 60.5
  Top Layer w10: v1(4404.49,4721.26) CN3.4
CPU_RESET: R37.1 SW18.4 | length 1597.4
  Top Layer w10: R37.1 5549.06,2740 5559.06,2730 5681,2730 6392.95,3441.95 SW18.4
GND: C2.1 C3.2 C4.1 C5.1 C6.1 C7.1 C8.1 DS1.2 DS2.2 DS3.2 DS4.2 DS5.2 DS6.2 DS7.2 DS8.2 DS9.2 DS10.2 DS11.2 DS12.2 DS13.2 DS14.2 DS15.2 DS16.2 J1.2 J1.3 P1.2 R1.1 R21.2 R22.2 R23.2 R24.2 R25.2 R26.2 R27.2 R28.2 R29.2 R30.2 R31.2 R32.2 R33.2 R34.2 R35.2 R36.2 R37.2 U1.1 U2.2 U3.1 U4.A2 U4.A12 U4.B5 U4.B15 U4.C8 U4.C18 U4.D1 U4.D11 U4.E4 U4.E14 U4.F7 U4.F9 U4.F11 U4.F17 U4.G8 U4.G10 U4.G12 U4.H3 U4.H7 U4.H9 U4.H11 U4.H13 U4.J6 U4.J8 U4.J12 U4.J16 U4.K7 U4.K11 U4.L2 U4.L8 U4.L12 U4.M5 U4.M7 U4.M9 U4.M11 U4.M15 U4.N8 U4.N10 U4.N12 U4.N18 U4.P1 U4.R4 U4.R14 U4.T7 U4.T17 U4.U10 U4.V3 U4.V13 Y1.3 | length 21801.1
  Top Layer w10: J1.2 J1.3 1555.67,4169.12 1475.55,4089 U1.1 ; DS1.2 1808.35,3548.65 1511,3846 1452,3846 1440,3858 1440,3905.45 1475.55,3941 U1.1 ; v1(1898,3971) 1898,3924.6 1920,3902.6 ; U2.2 1920,3902.6 ; R21.2 2080,1945 ; DS2.2 2111.46,1976.46 2080,1945 ; v1(2191.6,3970.55) 2260,3970.55 ; R1.1 2215,4809 2230,4794 2268,4794 2434,4960 2509.57,4960 2549.57,4920 2549.57,4858.13 ; v1(2230.71,4010.55) 2230.71,3999.84 2260,3970.55 ; U3.1 2260,3970.55 ; DS3.2 2414.57,2179.88 2276.38,2041.69 R22.2 ; C8.1 2549.57,4858.13 ; C7.1 2724.57,4854.43 ; DS5.2 3011.4,2275.61 3011.4,2254.23 2702.17,1945 R24.2 ; C5.1 3064.57,4792.13 ; DS7.2 3696,2353.99 3696,2949 3558,3087 3558,4053 3580,4075 C2.1 3684.53,4164.38 ; v1(3804,4171.3) 3775.45,4199.85 3720,4199.85 ; C4.1 3810,4148.97 3767.29,4191.69 3720,4199.85 ; C3.2 4668,4105 4688,4085 P1.2 5300,4010 5360,3950 5360,3160 5516,3004 ; Y1.3 4230,2883.23 4233.23,2880 DS9.2 ; DS11.2 4839.45,2121.25 4825.2,2107 R34.2 ; R36.2 R35.2 R34.2 ; R37.2 5584.49,2935.51 5516,3004 ; DS14.2 5516,2517.78 5516,3004 ; U1.1 1800.84,3975.16 1873.4,3902.6 1920,3902.6 ; 2080,1945 R22.2 ; R22.2 R23.2 R24.2 ; 2549.57,4858.13 2560,4868.57 2710.43,4868.57 2724.57,4854.43 ; R24.2 R25.2 R26.2 R27.2 R28.2 R29.2 R30.2 R31.2 R32.2 R33.2 R34.2 ; 2724.57,4854.43 2752.7,4882.57 2875.43,4882.57 2894.57,4863.43 C6.1 2894.57,4768.43 2895.43,4767.57 3040,4767.57 3064.57,4792.13 ; 3064.57,4792.13 3064.57,4705.43 3120,4650 3235.53,4650 3684.53,4201 3684.53,4164.38 ; 3684.53,4164.38 3720,4199.85
  Bottom Layer w10: DS1.2 1889.35,2366 2030.46,2366 DS2.2 ; v1(1898,3971) 2191.16,3971 v1(2191.6,3970.55) ; DS4.2 2786.68,2216 2951.79,2216 DS5.2 3083.79,2222 3260.9,2222 DS6.2 3393.9,2215 3557.01,2215 DS7.2 3680.01,2232 3877.12,2232 DS8.2 3975.12,2240 4188.23,2240 DS9.2 ; DS10.2 4581.34,2330 4794.45,2330 DS11.2 4884.45,2240 5097.56,2240 DS12.2 5187.56,2330 5400.67,2330 DS13.2 5514.67,2216 5679.78,2216 DS14.2 5793.78,2240 6006.89,2240 DS15.2 6120.89,2216 6286,2216 DS16.2
JTAG_TCK: P1.3 U4.E10 | length 80
  Top Layer w10: P1.3 v1(5400,3950.04)
JTAG_TDI: P1.5 U4.E11 | length 80
  Top Layer w10: P1.5 v1(5500,3950.04)
JTAG_TDO: P1.4 U4.E13 | length 80
  Top Layer w10: P1.4 v1(5400,4165)
JTAG_TMS: P1.6 U4.E12 | length 80
  Top Layer w10: P1.6 v1(5500,4165)
LED_0: R5.1 U4.H17 | length 102.8
  Top Layer w10: R5.1 2366.69,2729.77 v1(2418,2678.46)
LED_1: R6.1 U4.K15 | length 85
  Top Layer w10: R6.1 2565.59,2686.87 v1(2574,2678.46)
LED_2: R7.1 U4.J13 | length 119.6
  Top Layer w10: R7.1 2764.49,2701.97 v1(2808,2658.46)
LED_3: R8.1 U4.N14 | length 81.8
  Top Layer w10: R8.1 2963.39,2679.07 v1(2964,2678.46)
LED_4: R9.1 U4.R18 | length 96.3
  Top Layer w10: R9.1 3162.28,2714.18 v1(3198,2678.46)
LED_5: R10.1 U4.V17 | length 106.5
  Top Layer w10: R10.1 3396.61,2781.26 v1(3456.9,2841.54)
LED_6: R11.1 U4.U17 | length 106.5
  Top Layer w10: R11.1 3595.51,2738.74 v1(3655.8,2678.46)
LED_7: R12.1 U4.U16 | length 106.5
  Top Layer w10: R12.1 3794.41,2781.26 v1(3854.69,2841.54)
LED_8: R13.1 U4.V16 | length 106.5
  Top Layer w10: R13.1 3993.31,2781.26 v1(4053.59,2841.54)
LED_9: R14.1 U4.T15 | length 88.9
  Top Layer w10: v1(4174.49,2841.54) 4174.49,2809.61 4192.2,2791.9 R14.1
LED_10: R15.1 U4.U14 | length 125.3
  Top Layer w10: R15.1 4391.1,2813.26 4419.39,2841.54 v1(4451.39,2841.54)
LED_11: R16.1 U4.T16 | length 117.5
  Top Layer w10: R16.1 4590,2800 4631.54,2841.54 v1(4650.28,2841.54)
LED_12: R17.1 U4.V15 | length 125.3
  Top Layer w10: R17.1 4788.9,2706.74 4817.18,2678.46 v1(4849.18,2678.46)
LED_13: R18.1 U4.V14 | length 125.3
  Top Layer w10: R18.1 4987.8,2813.26 5016.08,2841.54 v1(5048.08,2841.54)
LED_14: R19.1 U4.V12 | length 125.3
  Top Layer w10: R19.1 5186.69,2813.26 5214.98,2841.54 v1(5246.98,2841.54)
LED_15: R20.1 U4.V11 | length 94.7
  Top Layer w10: R20.1 5350.16,2735.17 5382,2703.32 v1(5382,2678.46)
NetD1_2: D1.2 SW1.1 | length 1172.4
  Top Layer w10: SW1.1 2415,4523.15 2490.85,4599 2968,4599 3046.05,4520.95 D1.2
NetDS1_1: DS1.1 R5.2 | length 1010.3
  Top Layer w10: R5.2 v1(2462,2760)
  Bottom Layer w10: DS1.1 2183.35,2760 v1(2462,2760)
NetDS2_1: DS2.1 R6.2 | length 882.6
  Top Layer w10: DS2.1 2316.46,2590 2564,2590 2614,2640 2614,2760 R6.2
NetDS3_1: DS3.1 R7.2 | length 913.2
  Top Layer w10: DS3.1 2353.24,2246.33 2361.52,2246.33 2370.04,2254.85 2370.04,2303.44 2396.12,2329.53 2564.53,2329.53 2848,2613 2848,2740 2828,2760 R7.2
NetDS4_1: DS4.1 R8.2 | length 647.9
  Top Layer w10: DS4.1 2941.68,2609 2960,2609 3004,2653 3004,2733 2998.82,2738.18 R8.2
NetDS5_1: DS5.1 R9.2 | length 635
  Top Layer w10: DS5.1 3238,2602.21 3238,2740 3218,2760 R9.2
NetDS6_1: DS6.1 R10.2 | length 531.9
  Top Layer w10: DS6.1 3361.18,2422.28 R10.2
NetDS7_1: DS7.1 R11.2 | length 488.7
  Top Layer w10: DS7.1 3560.08,2318.07 R11.2
NetDS8_1: DS8.1 R12.2 | length 504.5
  Top Layer w10: R12.2 3758.98,2356.14 DS8.1
NetDS9_1: DS9.1 R13.2 | length 547.6
  Top Layer w10: R13.2 3957.87,2460.35 DS9.1
NetDS10_1: DS10.1 R14.2 | length 788.2
  Top Layer w10: R14.2 4156.77,2555 4188,2523.77 4188,2260 4208,2240 4391.34,2240 DS10.1
NetDS11_1: DS11.1 R15.2 | length 634
  Top Layer w10: R15.2 4355.67,2668.78 DS11.1
NetDS12_1: DS12.1 R16.2 | length 732.8
  Top Layer w10: v1(4554.57,2678) R16.2
  Bottom Layer w10: v1(4554.57,2678) 4947.57,2285 DS12.1
NetDS13_1: DS13.1 R17.2 | length 882.7
  Top Layer w10: R17.2 4753.46,2600 4797.46,2556 5074.67,2556 DS13.1
NetDS14_1: DS14.1 R18.2 | length 918
  Top Layer w10: R18.2 4952.36,2717.64 v1(4992,2678)
  Bottom Layer w10: v1(4992,2678) 5255.78,2678 DS14.1
NetDS15_1: DS15.1 R19.2 | length 1021.4
  Top Layer w10: v1(5151.26,2719) R19.2
  Bottom Layer w10: v1(5151.26,2719) 5517.89,2719 DS15.1
NetDS16_1: DS16.1 R20.2 | length 1170.4
  Top Layer w10: R20.2 5396,2760 5416,2780 v1(5416,2842)
  Bottom Layer w10: v1(5416,2842) 5698,2842 DS16.1
NetJ1_1: J1.1 SW1.2 | length 748.8
  Top Layer w10: J1.1@1315.51,4716.54 1555.67,4716.54 1644,4716.54 v1(1695.54,4665)
  Bottom Layer w10: v1(1695.54,4665) 1981.57,4665 SW1.2
NetL1_1: L1.1 U2.3 | length 1908.9
  Top Layer w10: U2.3 1985.8,3865.2 2023.99,3827 2151,3827 2242,3918 2361,3918 2383,3940 2383,4008 1982,4409 1982,4560 1995,4573 2320,4573 2384.57,4637.57 L1.1
NetR1_2: R1.2 R2.1 U2.6 | length 1404.5
  Top Layer w10: U2.6 2056,3940 2056,4195 1945,4306 1945,4610 2000,4665 2040,4665 2092.28,4717.28 R2.1 2092.28,4920 2135.28,4963 2207.43,4963 2250.43,4920 R1.2
NetR3_2: R3.2 U4.P9 | length 106.5
  Top Layer w10: R3.2 2912.72,3571.26 v1(2973,3631.54)
NetR4_2: R4.2 U4.P10 | length 106.5
  Top Layer w10: R4.2 2585.43,3571.26 v1(2645.72,3631.54)
SEG_A: CN1.1 U4.T10 | length 60.5
  Top Layer w10: CN1.1 v1(3885.51,4603.15)
SEG_B: CN1.2 U4.R10 | length 119.9
  Top Layer w10: v1(3705.09,4642.52) CN1.2
SEG_C: CN1.3 U4.K16 | length 60.5
  Top Layer w10: CN1.3 v1(3885.51,4681.89)
SEG_D: CN1.4 U4.K13 | length 60.5
  Top Layer w10: v1(3764.49,4721.26) CN1.4
SEG_E: CN1.5 U4.P15 | length 119.9
  Top Layer w10: CN1.5 v1(3944.91,4760.63)
SEG_F: CN1.6 U4.T11 | length 119.9
  Top Layer w10: v1(3705.09,4800) CN1.6
SEG_G: CN2.1 U4.L18 | length 60.5
  Top Layer w10: CN2.1 v1(4224.06,4601.57)
SW_1: R22.1 SW3.3 U4.L16 | length 504.2
  Top Layer w10: SW3.3 2265.31,1654 2276.38,1665.07 R22.1
SW_3: R24.1 SW5.3 U4.R15 | length 499.7
  Top Layer w10: SW5.3 2700.98,1659 2701.18,1659.2 R24.1
SW_5: R26.1 SW7.3 U4.T18 | length 504
  Top Layer w10: R26.1 3125.99,1664.67 3136.65,1654 SW7.3
SW_7: R28.1 SW9.3 U4.R13 | length 508.5
  Top Layer w10: R28.1 3550.79,1431.53 SW9.3
SW_9: R30.1 SW11.3 U4.U8 | length 513
  Top Layer w10: R30.1 3975.59,1442.4 SW11.3
SW_11: R32.1 SW13.3 U4.T13 | length 614.6
  Top Layer w10: v1(4318.85,1872) 4356.42,1909.57 R32.1 4400.39,1453.27 SW13.3
SW_13: R34.1 SW15.3 U4.U12 | length 619.1
  Top Layer w10: v1(4743.66,1872) 4781.23,1909.57 R34.1 4825.2,1464.13 SW15.3
SW_15: R36.1 SW17.3 U4.V10 | length 624.8
  Top Layer w10: SW17.3 5250,1475 R36.1 5291.11,1909.57 v1(5331.54,1950)
SYS_CLK: U4.E3 Y1.4 | length 69.4
  Top Layer w10: Y1.4 v1(4464.73,3475)
pads on no net: CN1.MP1 CN1.MP2 CN2.2 CN2.MP1 CN2.MP2 CN3.5 CN3.6 CN3.MP1 CN3.MP2 J1.MH1 J1.MH2 SW1.3 SW1.4 SW1.5 SW1.6 SW2.1 SW3.1 SW4.1 SW5.1 SW6.1 SW7.1 SW8.1 SW9.1 SW10.1 SW11.1 SW12.1 SW13.1 SW14.1 SW15.1 SW16.1 SW17.1 SW18.2 SW18.3 U2.5 U4.A1 U4.A3 U4.A4 U4.A5 U4.A6 U4.A8 U4.A9 U4.A10 U4.A11 U4.A13 U4.A14 U4.A15 U4.A16 U4.A18 U4.B1 U4.B2 U4.B3 U4.B4 U4.B6 U4.B7 U4.B8 U4.B9 U4.B10 U4.B11 U4.B12 U4.B13 U4.B14 U4.B16 U4.B17 U4.B18 U4.C1 U4.C2 U4.C4 U4.C5 U4.C6 U4.C7 U4.C9 U4.C10 U4.C11 U4.C12 U4.C14 U4.C15 U4.C16 U4.C17 U4.D2 U4.D3 U4.D4 U4.D5 U4.D7 U4.D8 U4.D9 U4.D10 U4.D12 U4.D13 U4.D14 U4.D15 U4.D17 U4.D18 U4.E1 U4.E2 U4.E5 U4.E6 U4.E7 U4.E8 U4.E9 U4.E15 U4.E16 U4.E17 U4.E18 U4.F1 U4.F3 U4.F4 U4.F5 U4.F6 U4.F13 U4.F14 U4.F15 U4.F16 U4.F18 U4.G1 U4.G2 U4.G3 U4.G4 U4.G6 U4.G13 U4.G14 U4.G16 U4.G17 U4.G18 U4.H1 U4.H2 U4.H4 U4.H5 U4.H14 U4.H15 U4.H16 U4.J2 U4.J3 U4.J4 U4.J5 U4.J9 U4.J10 U4.K1 U4.K3 U4.K5 U4.K6 U4.K9 U4.K10 U4.K17 U4.K18 U4.L1 U4.L3 U4.L4 U4.L5 U4.L6 U4.L9 U4.L10 U4.L13 U4.L14 U4.L15 U4.M1 U4.M2 U4.M3 U4.M4 U4.M6 U4.M14 U4.M16 U4.M17 U4.M18 U4.N1 U4.N2 U4.N4 U4.N5 U4.N6 U4.N15 U4.N16 U4.N17 U4.P2 U4.P3 U4.P4 U4.P5 U4.P7 U4.P11 U4.P12 U4.P13 U4.P17 U4.P18 U4.R1 U4.R2 U4.R3 U4.R5 U4.R6 U4.R7 U4.R8 U4.R9 U4.R11 U4.R12 U4.T1 U4.T3 U4.T4 U4.T5 U4.T6 U4.U1 U4.U2 U4.U3 U4.U4 U4.U6 U4.U7 U4.U9 U4.V1 U4.V2 U4.V4 U4.V5 U4.V6 U4.V7 U4.V9 Y1.2 Y1.5

## Polygon pours and split planes (outlines as drawn)
no net on Top Layer "NONET_L01_P000" (solid, pour order 0): 1005,4995 1000,4990 1000,980 7015,980 7035,1000 6995,1040 6995,5000

## Text inside footprints (layer, text, board x,y; h text height)
U4: Top Overlay "REFDES" at 3787.22,3711.77 h50; Top Overlay "RefDes" at 3799.72,3711.77 h50; Top Overlay "18" at 4167.44,4057.27 h50 r90; Top Overlay "1" at 3632.01,4057.27 h50 r90; Top Overlay "V" at 3529.22,3444.06 h50; Top Overlay "A" at 3529.22,3979.49 h50; Top Assembly "RefDes2" at 3787.22,3711.77 h50; Top Assembly "18" at 4167.44,4057.27 h50 r90; Top Assembly "1" at 3632.01,4057.27 h50 r90; Top Assembly "V" at 3529.22,3444.06 h50; Top Assembly "A" at 3529.22,3979.49 h50; Bottom Overlay "18" at 4117.44,4057.27 h50 r270; Bottom Overlay "1" at 3582.01,4057.27 h50 r270; Bottom Overlay "V" at 3554.22,3444.06 h50; Bottom Overlay "A" at 3554.22,3979.49 h50